# Altium PCB PCB1.PcbDoc
Units mm, origin at the board's own origin, x right, y up, seen from the top; angles counter-clockwise.
Board outline 28.25 x 17.75 mm, 2 copper layers (Top Layer, Bottom Layer); 10 components, 6 nets, 22 pads, 199 vias.
Unrouted connection lines stored in the file: 5.
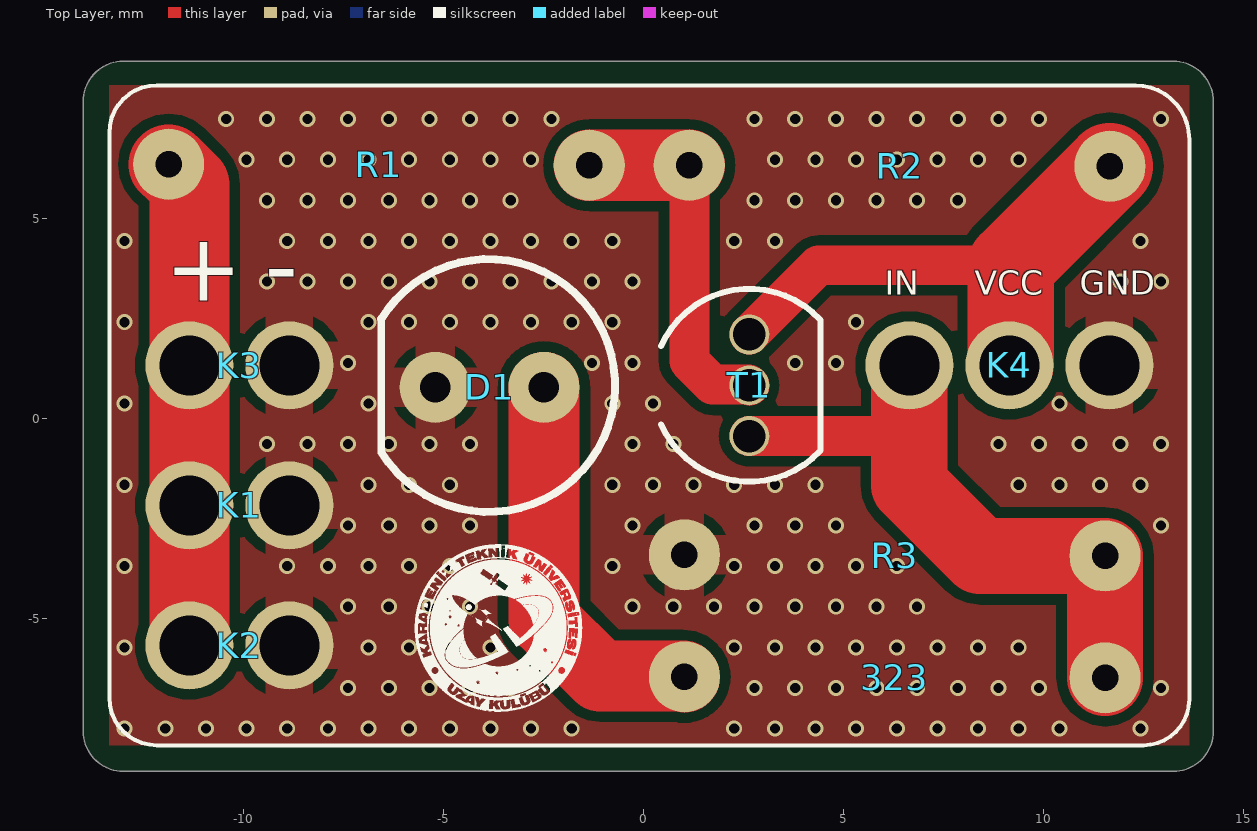
[diagram p0: Top Layer view]
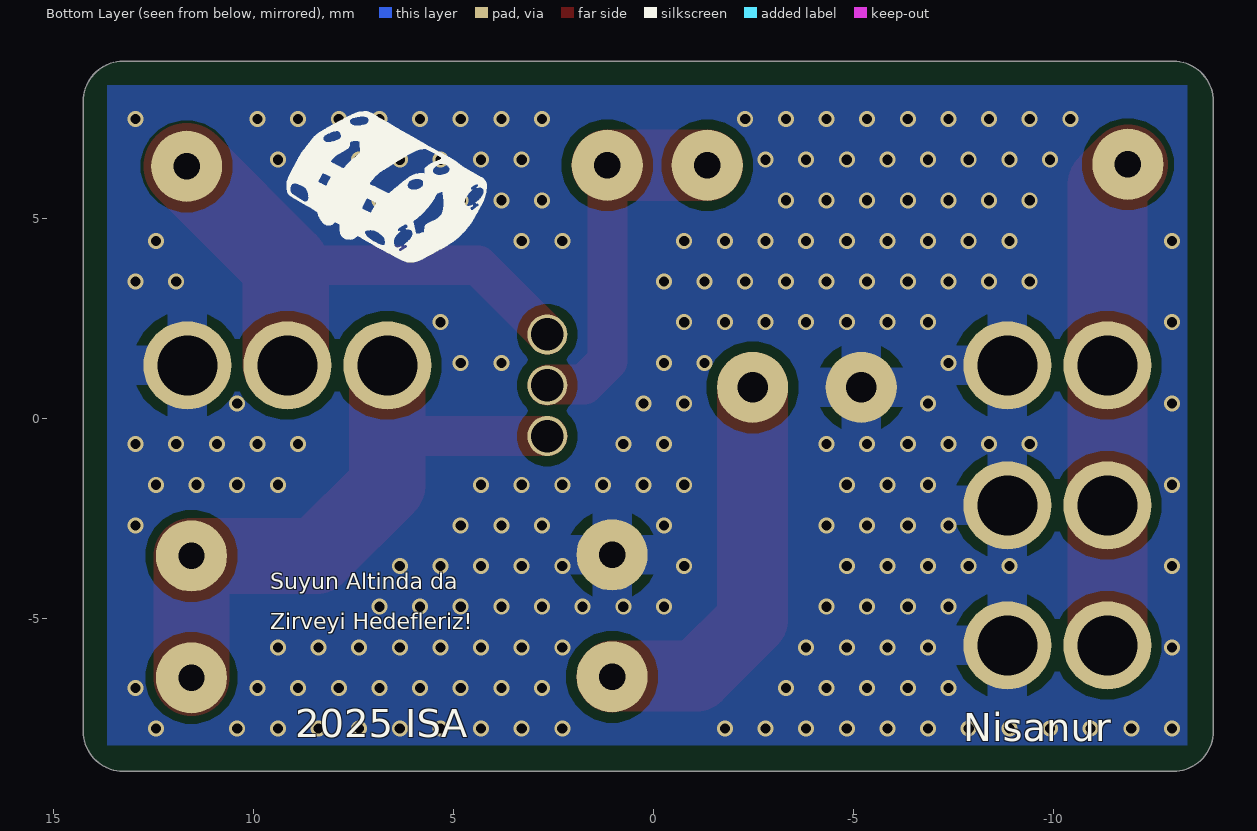
[diagram p1: Bottom Layer view, seen from below]

## Layer stack, top to bottom
Top Solder: solder mask 0.0102, Solder Resist, Dk 3.5
Top Layer: signal copper 0.0356
Dielectric 1: dielectric 0.32, FR-4, Dk 4.8
Bottom Layer: signal copper 0.0356
Bottom Solder: solder mask 0.0102, Solder Resist, Dk 3.5

## Board outline
-14.003,-7.809 ccw(c-13.003,-7.809) -13.003,-8.809 13.247,-8.809 ccw(c13.247,-7.809) 14.247,-7.809 14.247,7.941 ccw(c13.247,7.941) 13.247,8.941 -13.003,8.941 ccw(c-13.003,7.941) -14.003,7.941

## Design rules (kind name [scope] priority, off if disabled: settings)
Clearance [All] p1: gap=0.254 ignorepadtopadclearanceinfootprint=FALSE
PolygonConnect [All] p1: connectstyle=Relief reliefconductorwidth=0.254 reliefentries=4 polygonreliefangle="90 Angle" airgapwidth=0.254
RoutingVias [All] p1: holewidth=0.711 width=1.27 viastyle="Through Hole" minholewidth=0.711 minwidth=1.27 maxholewidth=0.711 maxwidth=1.27
SolderMaskExpansion [All] p1: expansion=0.102 istentingtop=FALSE
Width [All] p1: maxlimit=50 minlimit=0.254 preferedwidth=0.254 minimp=50.000000 maximp=50.000000 favimp=50.000000
30 further rules are at their usual default settings.

## Components (designator, comment, footprint, x,y, rotation, side; value= is the part's Value field where it differs from the comment)
323 "240" RESISTOR 1.026,-6.447 r0 top (schematic designator R4)
D1 "LED" LED -3.853,0.841 r180 top
K1 "BAKIR UÇ" "KONNECTOR 2 PIN" -11.353,-2.159 r0 top
K2 "BAKIR UÇ" "KONNECTOR 2 PIN" -11.353,-5.659 r0 top
K3 "BAKIR UÇ" "KONNECTOR 2 PIN" -11.353,1.341 r0 top
K4 "HEADER" "KONNECTOR 3 PIN" 11.647,1.341 r180 top
R1 "1K" RESISTOR -11.869,6.367 r0 top
R2 "27K" RESISTOR 1.147,6.341 r0 top
R3 "1K" RESISTOR 1.026,-3.399 r0 top
T1 "BC557" TRANSİSTOR 2.647,0.841 r90 top

## Footprints (in the part's own frame and the unit in brackets; to place one, negate y for a bottom-side part, rotate by r counter-clockwise, add the part's x,y. Pads: shape width x height; smd on the part's side, far side on the other; paste and mask are expansions set on the pad)
"KONNECTOR 2 PIN" [mm]
  round 2.2 hole 1.5 mask+0.05: 1(0,0) 2(2.5,0)
  body extent -1.25,-1.25 3.79,1.25, height 9
"KONNECTOR 3 PIN" [mm]
  round 2.2 hole 1.5 mask+0.05: 1(0,0) 2(2.5,0) 3(5,0)
  body extent -1.25,-1.25 6.33,1.25, height 9.02
LED [mil]
  round 70 hole 30 mask+1.97: 1(-53.85,2.06) 2(53.15,2.06)
  silkscreen extent -124,-124 106,125, body extent -119,-117 98,119, height 350
RESISTOR [mil]
  round 70 hole 26 mask+1.97: 1(0,0) 2(414,-1)
  body extent -12,-49 426,49, height 133
TRANSİSTOR [mm]
  round 1 hole 0.813: 1(0,0) 2(-1.27,0) 3(1.27,0)
  silkscreen extent -2.41,-1.78 2.41,2.2, body extent -2.4,-1.53 2.4,2.4, height 5.34

## Part data
323 R1 R2 R3: library part RESISTOR
K1 K2 K3: library part "HEADER 2 PIN"
K4: library part "HEADER 3 PIN"
T1: library part TRANSISTOR

## Via types
v1: diameter 0.4, hole 0.254, Top Layer to Bottom Layer, tented both sides, 199 vias

## Nets (pads, with @x,y where several pads share a name; then routed paths per layer and width w, separated by ;. In a path a pad name is that pad's centre, name@x,y a point inside that pad or via, vN(x,y) a via of type N, cw(c..) or ccw(c..) an arc to the next point about the centre after c; other vN are vias at no path point)
GND: D1.2 K1.2 K2.2 K3.2 K4.1 R3.1
  other v1: -12.969,-7.743 -11.953,-7.743 -10.937,-7.743 -9.921,-7.743 -8.905,-7.743 -7.889,-7.743 -6.873,-7.743 -5.857,-7.743 -4.841,-7.743 -3.825,-7.743 -2.809,-7.743 -1.793,-7.743 2.271,-7.743 3.287,-7.743 4.303,-7.743 5.319,-7.743 6.335,-7.743 7.351,-7.743 8.367,-7.743 9.383,-7.743 10.399,-7.743 12.431,-7.743 -7.381,-6.727 -6.365,-6.727 -5.349,-6.727 -4.333,-6.727 -3.317,-6.727 2.779,-6.727 3.795,-6.727 4.811,-6.727 5.827,-6.727 6.843,-6.727 7.859,-6.727 8.875,-6.727 9.891,-6.727 12.939,-6.727 -12.969,-5.711 -6.873,-5.711 -5.857,-5.711 -4.841,-5.711 -3.825,-5.711 2.271,-5.711 3.287,-5.711 4.303,-5.711 5.319,-5.711 6.335,-5.711 7.351,-5.711 8.367,-5.711 9.383,-5.711 -7.381,-4.695 -6.365,-4.695 -5.349,-4.695 -4.333,-4.695 -0.269,-4.695 0.747,-4.695 1.763,-4.695 2.779,-4.695 3.795,-4.695 4.811,-4.695 5.827,-4.695 6.843,-4.695 -12.969,-3.679 -8.905,-3.679 -7.889,-3.679 -6.873,-3.679 -5.857,-3.679 -4.841,-3.679 -0.777,-3.679 2.271,-3.679 3.287,-3.679 4.303,-3.679 5.319,-3.679 6.335,-3.679 -7.381,-2.663 -6.365,-2.663 -5.349,-2.663 -4.333,-2.663 -0.269,-2.663 2.779,-2.663 3.795,-2.663 4.811,-2.663 12.939,-2.663 -12.969,-1.647 -6.873,-1.647 -5.857,-1.647 -4.841,-1.647 -0.777,-1.647 0.239,-1.647 1.255,-1.647 2.271,-1.647 3.287,-1.647 4.303,-1.647 9.383,-1.647 10.399,-1.647 11.415,-1.647 12.431,-1.647 -9.413,-0.631 -8.397,-0.631 -7.381,-0.631 -6.365,-0.631 -5.349,-0.631 -4.333,-0.631 -0.269,-0.631 0.747,-0.631 8.875,-0.631 9.891,-0.631 10.907,-0.631 11.923,-0.631 12.939,-0.631 -12.969,0.385 -6.873,0.385 -0.777,0.385 0.239,0.385 10.399,0.385 -7.381,1.401 -1.285,1.401 -0.269,1.401 3.795,1.401 4.811,1.401 -12.969,2.417 -6.873,2.417 -5.857,2.417 -4.841,2.417 -3.825,2.417 -2.809,2.417 -1.793,2.417 -0.777,2.417 5.319,2.417 -9.413,3.433 -8.397,3.433 -7.381,3.433 -6.365,3.433 -5.349,3.433 -4.333,3.433 -3.317,3.433 -2.301,3.433 -1.285,3.433 -0.269,3.433 11.923,3.433 12.939,3.433 -12.969,4.449 -8.905,4.449 -7.889,4.449 -6.873,4.449 -5.857,4.449 -4.841,4.449 -3.825,4.449 -2.809,4.449 -1.793,4.449 -0.777,4.449 2.271,4.449 3.287,4.449 12.431,4.449 -9.413,5.465 -8.397,5.465 -7.381,5.465 -6.365,5.465 -5.349,5.465 -4.333,5.465 -3.317,5.465 2.779,5.465 3.795,5.465 4.811,5.465 5.827,5.465 6.843,5.465 7.859,5.465 -9.921,6.481 -8.905,6.481 -7.889,6.481 -6.873,6.481 -5.857,6.481 -4.841,6.481 -3.825,6.481 -2.809,6.481 3.287,6.481 4.303,6.481 5.319,6.481 6.335,6.481 7.351,6.481 8.367,6.481 9.383,6.481 -10.429,7.497 -9.413,7.497 -8.397,7.497 -7.381,7.497 -6.365,7.497 -5.349,7.497 -4.333,7.497 -3.317,7.497 -2.301,7.497 2.779,7.497 3.795,7.497 4.811,7.497 5.827,7.497 6.843,7.497 7.859,7.497 8.875,7.497 9.891,7.497 12.939,7.497
NetD1_1: 323.1 D1.1 | length 9.9
  Top Layer w1.778: D1.1 -2.485,-5.027 -1.089,-6.423 1.002,-6.423 323.1
NetR1_2: R1.2 R2.1 T1.1 | length 9.1
  Top Layer w1: R2.1 1.147,1.443 1.733,0.857 2.631,0.857 T1.1
  Top Layer w1.778: R1.2 R2.1
PROBE: K1.1 K2.1 K3.1 R1.1 | length 12.2
  Top Layer w2: R1.1 -11.353,5.851 K3.1 K1.1 K2.1
SIGNAL: 323.2 K4.3 R3.2 T1.2 | length 15.7
  Top Layer w1: T1.2 6.647,-0.429
  Top Layer w1.905: K4.3 6.647,-0.429 6.647,-1.659 8.413,-3.425 R3.2 323.2
VCC: K4.2 R2.2 T1.3 | length 13.2
  Top Layer w0.991: T1.3 4.377,3.841 9.147,3.841
  Top Layer w2.159: K4.2@9.185,1.38 9.185,3.839 R2.2

## Polygon pours and split planes (outlines as drawn)
GND on Bottom Layer "GND_L02_P001" (solid, pour order 1): -13.353,8.341 13.647,8.341 13.647,-8.159 -13.353,-8.159
GND on Top Layer "GND_L01_P000" (solid, pour order 0): -13.353,8.341 13.647,8.341 13.647,-8.159 -13.353,-8.159

## Silkscreen, mask and mechanical layers (free items; w line width, h text height)
Top Overlay:
  drawing of 26 lines, arcs and shapes, not listed
  text "IN" at 6.037,3.106 h0.6
  text "VCC" at 8.287,3.106 h0.6
  text "GND" at 10.912,3.106 h0.6
  text "-" at -9.463,3.007 h1.7
  text "+" at -11.963,2.948 h1.7
Bottom Overlay:
  region: 3082 vertices and 13 holes, not listed, extent 4.158,3.912 9.166,7.69
  text "Suyun Altinda da" at 9.577,-4.255 h0.4
  text "Zirveyi Hedefleriz!" at 9.577,-5.255 h0.4
  text "2025 ISA" at 8.947,-7.959 h0.7
  text "Nisanur" at -7.753,-8.059 h0.7
Drill Guide:
  lines w0.254: -14.003,-7.809 ccw(c-13.003,-7.809) -13.003,-8.809 13.247,-8.809 ccw(c13.247,-7.809) 14.247,-7.809 14.247,-7.309 14.247,7.941 ccw(c13.247,7.941) 13.247,8.941 -12.753,8.941 -13.003,8.941 ccw(c-13.003,7.941) -14.003,7.941 -14.003,-7.809